# Altium PCB X-4x4-ADE-12MH+.PcbDoc
Units mm, origin at the board's own origin, x right, y up, seen from the top; angles counter-clockwise.
Board outline 13.4 x 13.4 mm, 4 copper layers (Top Layer, Layer 1, Layer 2, Bottom Layer 1), stack 0.775 mm thick; 4 components, 4 nets, 15 pads, 54 vias.
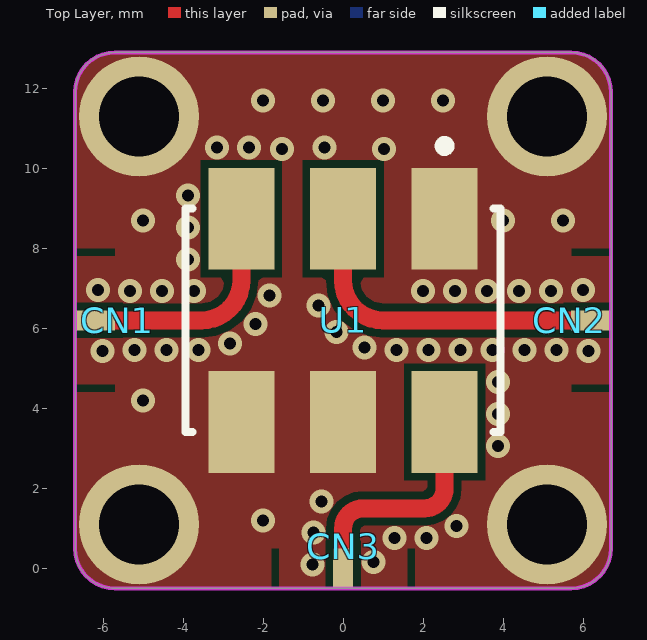
[diagram p0: Top Layer view]
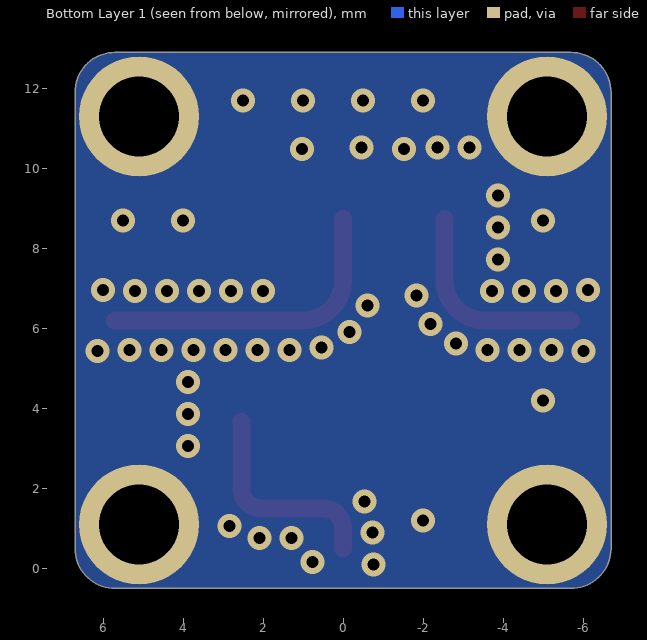
[diagram p1: Bottom Layer 1 view, seen from below]
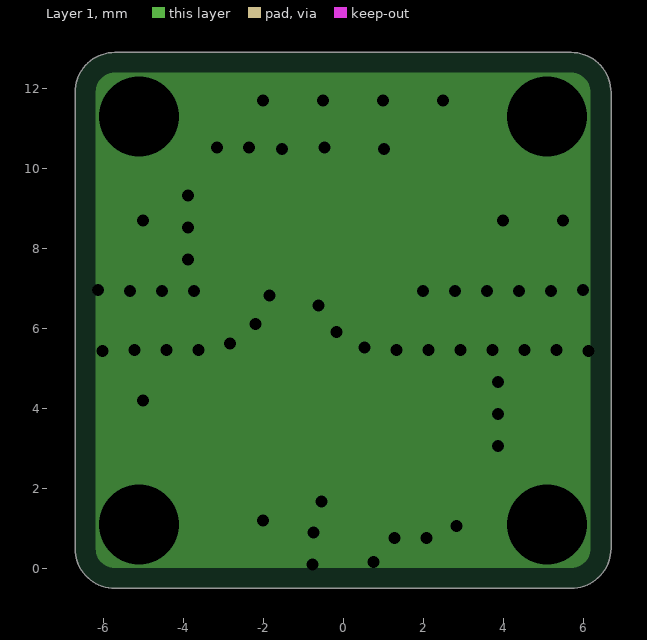
[diagram p2: Layer 1, clearances drawn from the general rule]
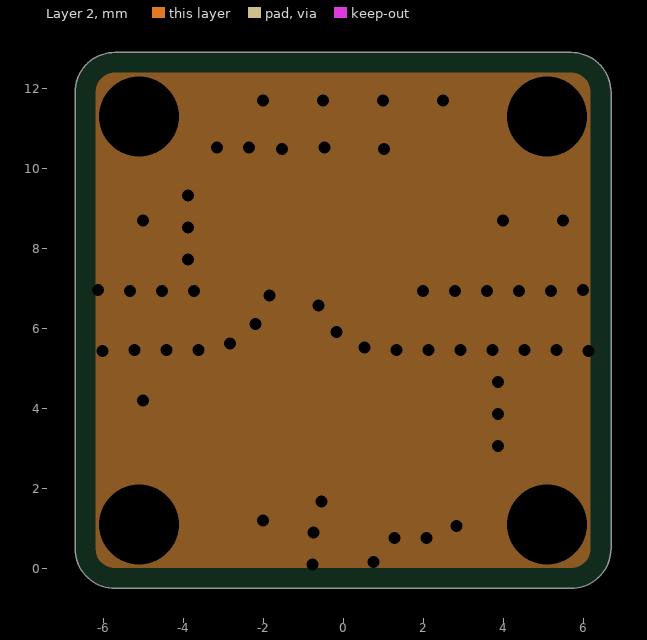
[diagram p3: Layer 2, clearances drawn from the general rule]

## Layer stack, top to bottom
Top Solder: solder mask 0.0102, Solder Resist, Dk 3.5
Top Layer: signal copper 0.035
Dielectric 2: prepreg 0.254, PP-006, Dk 4.1
Layer 1: plane copper 0.035, net GND
Dielectric 1: dielectric 0.127, FR-4, Dk 4.8
Layer 2: plane copper 0.035, net GND
Dielectric 3: prepreg 0.254, PP-006, Dk 4.1
Bottom Layer 1: signal copper 0.035
Bottom Solder: solder mask 0.0102, Solder Resist, Dk 3.5

## Board outline
-6.7,0.5 -6.7,11.9 cw(c-5.7,11.9) -5.7,12.9 5.7,12.9 cw(c5.7,11.9) 6.7,11.9 6.7,0.5 cw(c5.7,0.5) 5.7,-0.5 -5.7,-0.5 cw(c-5.7,0.5)

## Design rules (kind name [scope] priority, off if disabled: settings)
Clearance [All] p1: gap=0.2 ignorepadtopadclearanceinfootprint=FALSE
HoleSize [All] p1: absolutevalues=TRUE maxlimit=5 minlimit=0.3 maxpercent=80.000 minpercent=20.000
PlaneClearance [All] p1: clearance=0.508
PlaneConnect [All] p1: planeconnectstyle=Direct reliefexpansion=0.508 reliefentries=4 reliefconductorwidth=0.254 reliefairgap=0.254
PolygonConnect [All] p1: connectstyle=Direct reliefconductorwidth=0.254 reliefentries=4 polygonreliefangle="90 Angle" airgapwidth=0.254
RoutingVias [All] p1: holewidth=0.711 width=1.27 viastyle="Through Hole" minholewidth=0.711 minwidth=1.27 maxholewidth=0.711 maxwidth=1.27 useviatemplates=TRUE viatemplateguid#1={7A92E554-9EE6-4D6B-B67B-1768727A5324} viatemplatename#1=v60h30m0mx0
SolderMaskExpansion [All] p1: expansion=0.102
Width Width_50ohm [InNetClass('50ohm')] p1: maxlimit=0.45 minlimit=0.45 preferedwidth=0.45 impedanceprofiledriven=TRUE impedanceprofileid={D2B77361-9B7D-4BD5-B69E-70E315500705} impedanceprofilevalue=50.000000 minimp=50.000000 maximp=50.000000 favimp=50.000000 checkconnectedcopper=TRUE
Width [All] p2: maxlimit=5 minlimit=0.2 preferedwidth=0.2
27 further rules are at their usual default settings.

## Classes and differential pairs
net class 50ohm: NetCN2_1

## Components (designator, comment, footprint, x,y, rotation, side; value= is the part's Value field where it differs from the comment)
CN1 "X-CONNECTOR" X-CONNECTOR-PCB -5.1,11.3 r0 top
CN2 "X-CONNECTOR" X-CONNECTOR-PCB 5.1,1.1 r180 top
CN3 "X-CONNECTOR" X-CONNECTOR-PCB -5.1,1.1 r90 top
U1 "ADE-1ASK" MINI-CD542-6_V 0,6.2 r270 top

## Footprints (in the part's own frame and the unit in brackets; to place one, negate y for a bottom-side part, rotate by r counter-clockwise, add the part's x,y. Pads: shape width x height; smd on the part's side, far side on the other; paste and mask are expansions set on the pad)
MINI-CD542-6_V [mm] "SMD, 6-Leads, Body 5.59x7.87mm, Pitch 2.54mm"
  rect 2.54x1.65 smd paste+0: 1(-2.54,2.54) 2(-2.54,0) 3(-2.54,-2.54) 4(2.54,-2.54) 5(2.54,0) 6(2.54,2.54)
  silkscreen extent -4.48,-3.94 2.8,3.94, body extent -2.8,-3.94 2.8,3.94, height 2.84
X-CONNECTOR-PCB [mm]
  rect 1x0.5 smd: 1(-1.1,-5.1)
  round 3 hole 2: M1(0,0) M2(0,-10.2)
  Top Layer pour cut-out: -1.616,-3.576
  Top Layer pour cut-out: -1.6,-3.5 -0.6,-3.5 -0.6,-3.3 -1.6,-3.3
  Top Layer pour cut-out: -0.6,-6.7 -1.6,-6.7 -1.6,-6.9 -0.6,-6.9

## Part data
CN1 CN2 CN3: library part X-CONNECTOR-5, "CONECTOR PARA MÓDULOS X MICROWAVE", Mount=TH, RoHS=Yes
U1: library part CMP-2000-05756-1, "Frequency Mixer, Level 7 (LO Power +7 dBm), 2 to 600 MHz, -40 to 85 degC, 6-Pin CD542, Tape and Reel", Manufacturer=Mini-Circuits, Package Description="6-Pin Surface Mount Device, Body 5.59 x 7.87 mm, Pitch 2.54 mm", Package Reference=CD542-6, Datasheet URL=https://www.minicircuits.com/pdfs/ADE-1ASK.pdf, Datasheet Version="Rev. F, 05/2015", Manufacturer URL=http://www.minicircuits.com/, Mounting Technology=SurfaceMount, Package URL=http://www.minicircuits.com/case_styles/CD542.pdf

## Via types
v1: diameter 0.6, hole 0.3, Top Layer to Bottom Layer 1, tented both sides, 54 vias

## Nets (pads, with @x,y where several pads share a name; then routed paths per layer and width w, separated by ;. In a path a pad name is that pad's centre, name@x,y a point inside that pad or via, vN(x,y) a via of type N, cw(c..) or ccw(c..) an arc to the next point about the centre after c; other vN are vias at no path point)
GND: CN1.M1 CN1.M2 CN2.M1 CN2.M2 CN3.M1 CN3.M2 U1.1 U1.4 U1.5
  other v1: -0.76,0.096 0.76,0.161 1.289,0.761 2.089,0.764 -0.739,0.895 2.835,1.053 -2,1.2 -0.541,1.67 3.875,3.065 3.875,3.865 -5,4.2 3.875,4.665 -6.007,5.44 6.135,5.44 -5.207,5.461 -4.407,5.461 -3.607,5.461 1.335,5.461 2.135,5.461 2.935,5.461 3.735,5.461 4.535,5.461 5.335,5.461 0.538,5.525 -2.823,5.619 -0.165,5.907 -2.191,6.109 -0.616,6.568 -1.839,6.828 -5.328,6.939 -4.528,6.939 -3.728,6.939 1.999,6.939 2.799,6.939 3.599,6.939 4.399,6.939 5.199,6.939 -6.128,6.96 5.999,6.96 -3.875,7.726 -3.875,8.526 -5,8.7 4,8.7 5.5,8.7 -3.875,9.326 -1.52,10.481 1.02,10.481 -3.156,10.52 -2.356,10.52 -0.461,10.52 -2,11.7 -0.5,11.7 1,11.7 2.5,11.7
NetCN1_1: CN1.1 U1.3 | length 5.3
  Top Layer w0.45: -5.7,6.2 -3.54,6.2 ccw(c-3.54,7.2) -2.54,7.2 U1.3
NetCN2_1: CN2.1 U1.2 | length 7.8
  Top Layer w0.45: U1.2 0,7.2 ccw(c1,7.2) 1,6.2 5.7,6.2
NetCN3_1: CN3.1 U1.6 | length 5.3
  Top Layer w0.45: 0,0.5 0,1 cw(c0.5,1) 0.5,1.5 2.04,1.5 ccw(c2.04,2) 2.54,2 U1.6

## Polygon pours and split planes (outlines as drawn)
GND on Top Layer "Top Layer-GND" (solid, pour order 5): -5.7,-0.5 cw(c-5.7,0.5) -6.7,0.5 -6.7,11.9 cw(c-5.7,11.9) -5.7,12.9 5.7,12.9 cw(c5.7,11.9) 6.7,11.9 6.7,0.5 cw(c5.7,0.5) 5.7,-0.5
GND on Bottom Layer 1 "Bottom Layer 1-GND" (solid, pour order 3): -5.7,-0.5 cw(c-5.7,0.5) -6.7,0.5 -6.7,11.9 cw(c-5.7,11.9) -5.7,12.9 5.7,12.9 cw(c5.7,11.9) 6.7,11.9 6.7,0.5 cw(c5.7,0.5) 5.7,-0.5
GND on Layer 1 (split plane): 5.796,12.382 5.888,12.354 5.973,12.309 6.048,12.248 6.109,12.173 6.154,12.088 6.182,11.996 6.191,11.912 6.19,11.9 6.19,0.5 6.191,0.488 6.182,0.404 6.154,0.312 6.109,0.227 6.048,0.152 5.973,0.091 5.888,0.046 5.796,0.018 5.712,0.009 5.7,0.01 -5.7,0.01 -5.712,0.009 -5.796,0.018 -5.888,0.046 -5.973,0.091 -6.048,0.152 -6.109,0.227 -6.154,0.312 -6.182,0.404 -6.191,0.488 -6.19,0.5 -6.19,11.9 -6.191,11.912 -6.182,11.996 -6.154,12.088 -6.109,12.173 -6.048,12.248 -5.973,12.309 -5.888,12.354 -5.796,12.382 -5.712,12.391 -5.7,12.39 5.7,12.39 5.712,12.391
GND on Layer 2 (split plane): 5.796,12.382 5.888,12.354 5.973,12.309 6.048,12.248 6.109,12.173 6.154,12.088 6.182,11.996 6.191,11.912 6.19,11.9 6.19,0.5 6.191,0.488 6.182,0.404 6.154,0.312 6.109,0.227 6.048,0.152 5.973,0.091 5.888,0.046 5.796,0.018 5.712,0.009 5.7,0.01 -5.7,0.01 -5.712,0.009 -5.796,0.018 -5.888,0.046 -5.973,0.091 -6.048,0.152 -6.109,0.227 -6.154,0.312 -6.182,0.404 -6.191,0.488 -6.19,0.5 -6.19,11.9 -6.191,11.912 -6.182,11.996 -6.154,12.088 -6.109,12.173 -6.048,12.248 -5.973,12.309 -5.888,12.354 -5.796,12.382 -5.712,12.391 -5.7,12.39 5.7,12.39 5.712,12.391

## Keep-outs
Top Layer:
  the board outline again, w0.1

## Silkscreen, mask and mechanical layers (free items; w line width, h text height)
Mechanical 1:
  the board outline again, w0.2